# EAGLE board ProtoCAT-Panel-v10 (EAGLE 6.6.0), part 1 of 2
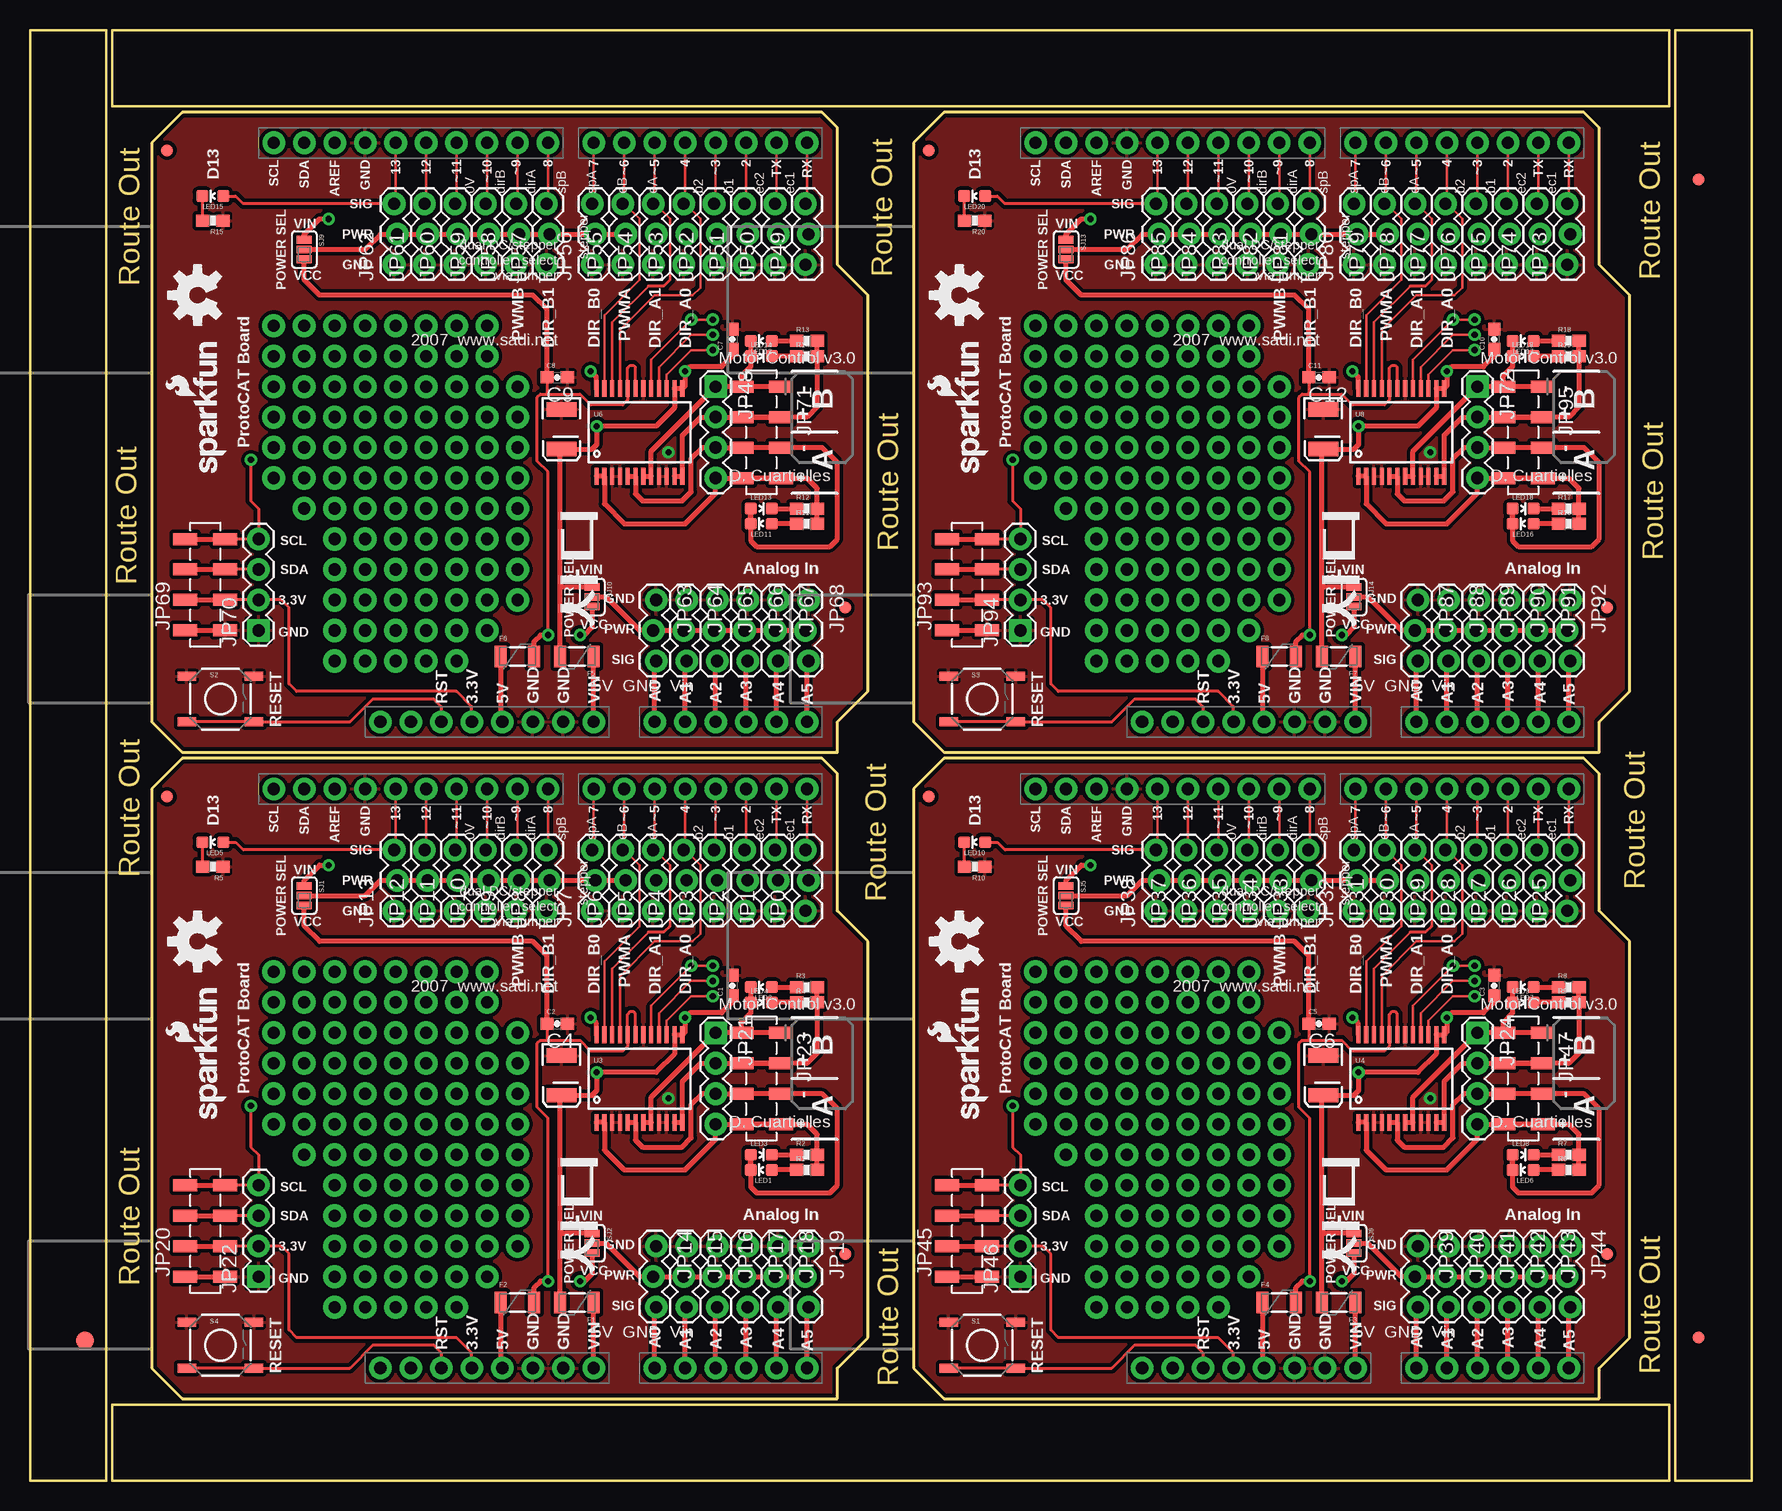
[diagram p0: board, top side]
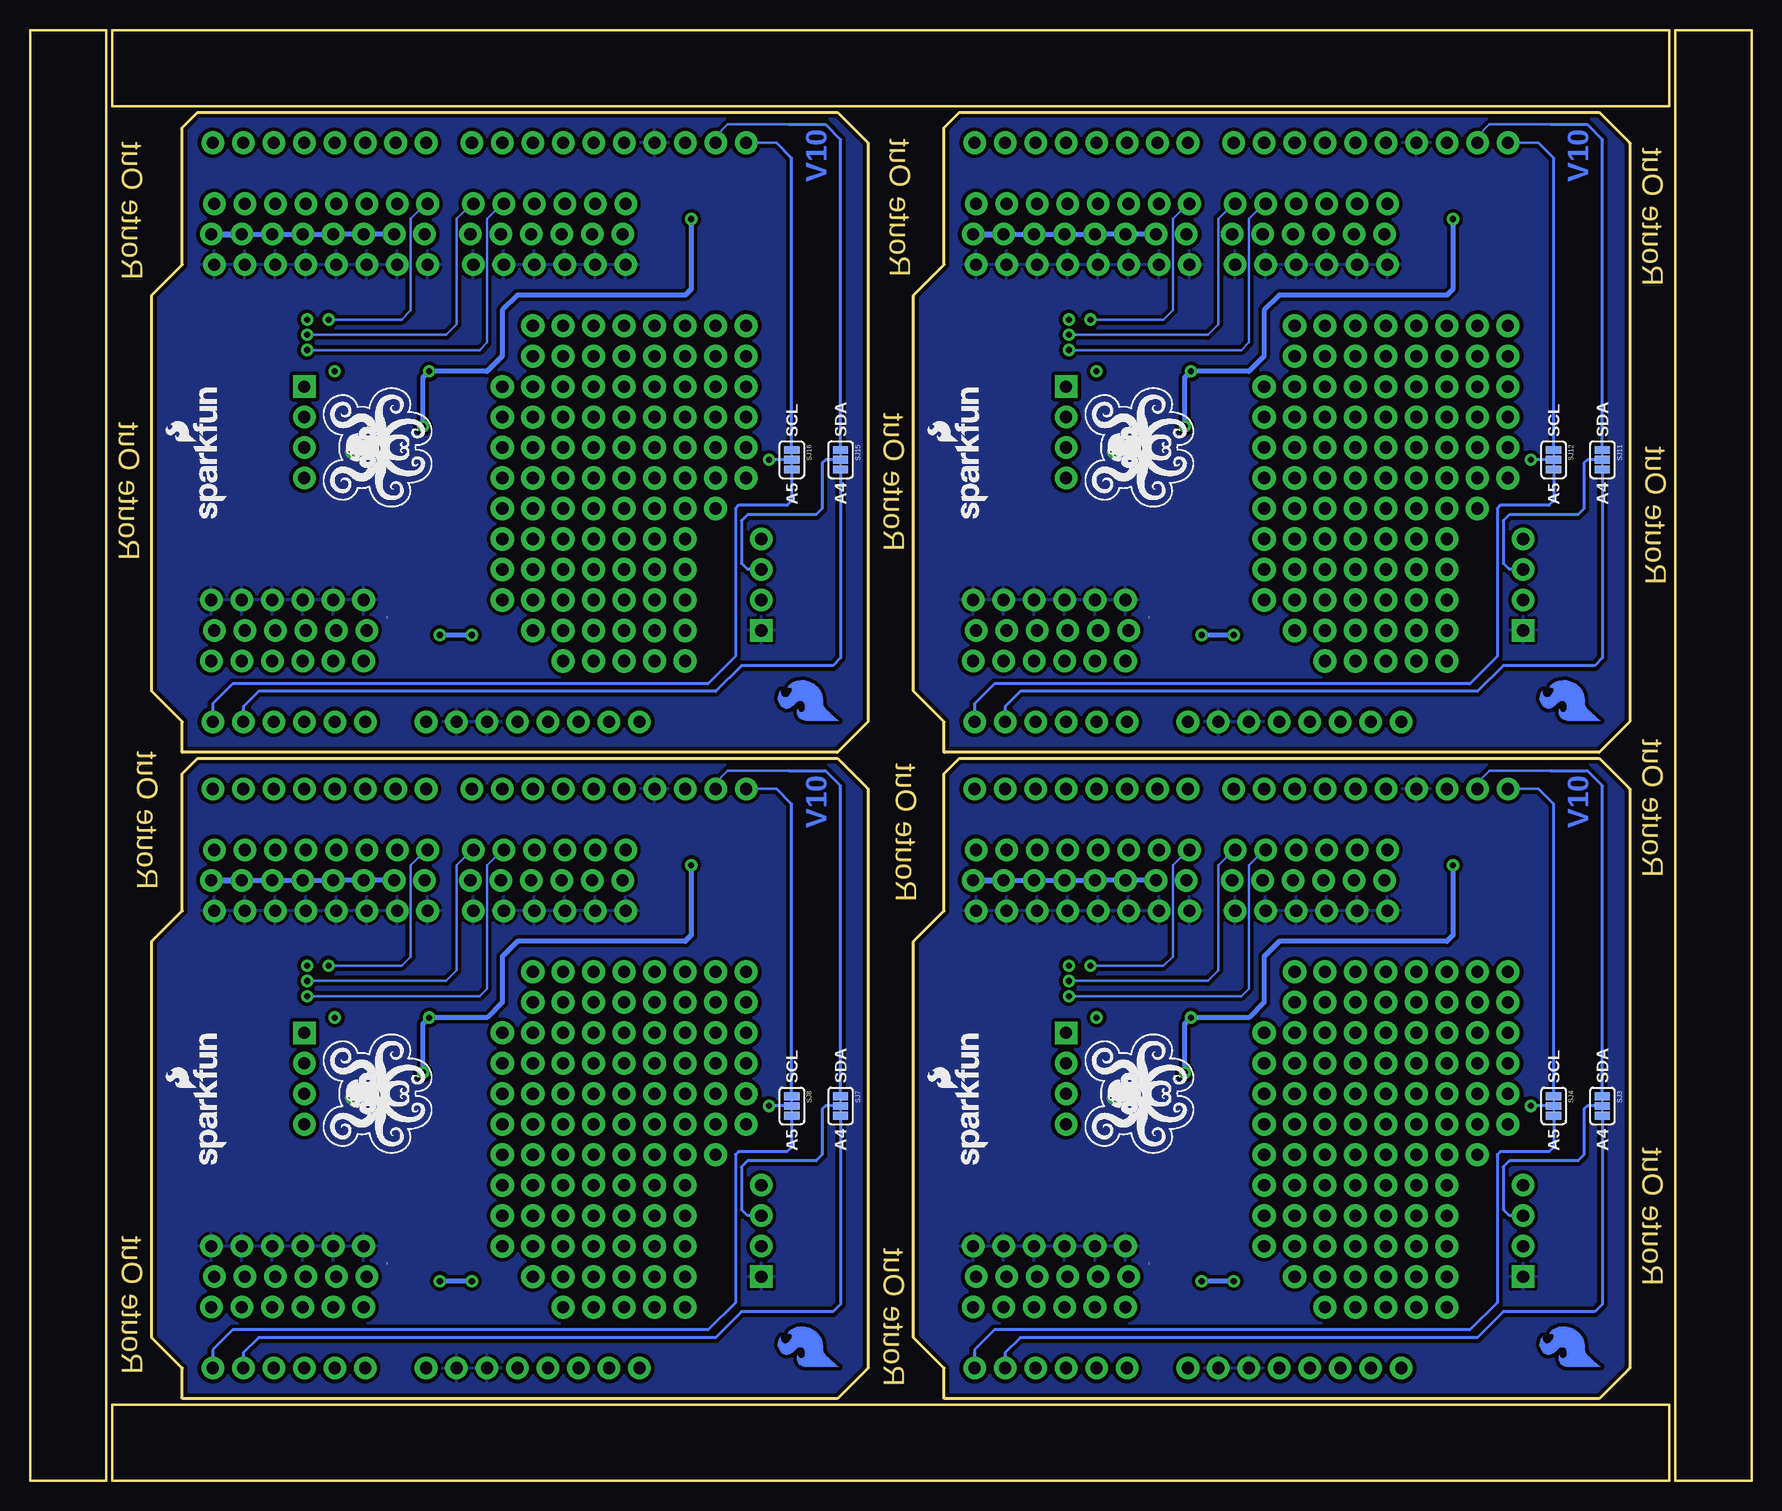
[diagram p1: board, bottom side, seen from below]

Size 143.51 x 120.9 mm. Coordinates in mm from the lower left corner, seen from the top.
Outline: 10.16,57.66 10.16,9.4 12.7,6.86 67.31,6.86 67.31,9.4 69.85,11.94 69.85,44.96 67.31,47.5 67.31,58.93 66.04,60.2 12.7,60.2 10.16,57.66
Outline: 73.66,57.66 73.66,9.4 76.2,6.86 130.81,6.86 130.81,9.4 133.35,11.94 133.35,44.96 130.81,47.5 130.81,58.93 129.54,60.2 76.2,60.2 73.66,57.66
Outline: 10.16,111.51 10.16,63.25 12.7,60.71 67.31,60.71 67.31,63.25 69.85,65.79 69.85,98.81 67.31,101.35 67.31,112.78 66.04,114.05 12.7,114.05 10.16,111.51
Outline: 73.66,111.51 73.66,63.25 76.2,60.71 130.81,60.71 130.81,63.25 133.35,65.79 133.35,98.81 130.81,101.35 130.81,112.78 129.54,114.05 76.2,114.05 73.66,111.51
Outline: 6.35,0 6.35,120.9 0,120.9 0,0 6.35,0
Outline: 143.51,0 143.51,120.9 137.16,120.9 137.16,0 143.51,0
Outline: 6.86,0 136.65,0 136.65,6.35 6.86,6.35 6.86,0
Outline: 6.86,114.55 136.65,114.55 136.65,120.9 6.86,120.9 6.86,114.55
Copper layers (1*16): Top 0.035mm / dielectric 1.5mm / Bottom 0.035mm
Design rules "SparkFun-2-layer": minimum track width 7mil, minimum drill 15mil, track to track 8mil, track to pad 8mil, pad to pad 8mil, via to via 8mil, smd to smd 8mil, copper to edge 8mil, drill to drill 8mil, minimum pad ring 12mil, minimum via ring 10mil, stop-mask expansion 4mil, vias tented up to drill 20mil, thermal gap 10mil
Net classes: 1 power: width 0.61 mm

## Footprints (pad centres in the part's own frame; a part is rotated, then mirrored left to right if it is on the bottom)
0603-CAP = smd 1.1 x 1: 1 -0.85,0; 2 0.85,0
EIA3528 = smd 1.2 x 2.5: A 1.65,0; C -1.65,0
FIDUCIAL-1.5X3 = smd 1.5 x 1.5: 1 0,0
FIDUCIAL-1X2 = smd 1 x 1: 1 0,0
PTC-1206 = smd 1 x 1.8: 1 -1.4,0; 2 1.4,0
1X03_LOCK = drill 1.016 pad 1.88: 1 0,0.127; 2 2.54,-0.127; 3 5.08,0.127
1X04_SMD_STRAIGHT_COMBO = smd 1 x 2: 1 0,-1.65; 1-2 0,1.65; 2 2.54,1.65; 2-2 2.54,-1.65; 3 5.08,-1.65; 3-2 5.08,1.65; 4 7.62,1.65; 4-2 7.62,-1.65
1X04 = drill 1.016 pad 1.88 square: 1 0,0 | drill 1.016 pad 1.88: 2 2.54,0; 3 5.08,0; 4 7.62,0
LED-0603 = smd 1 x 1: A 0,-0.877; C 0,0.877
0603-RES = smd 1.1 x 1: 1 -0.85,0; 2 0.85,0
TACTILE-SWITCH-SMD = smd 1.524 x 0.762: 1 -2.794,1.905; 2 2.794,1.905; 3 -2.794,-1.905; 4 2.794,-1.905
PAD-JUMPER-3-2OF3_NC_BY_PASTE_YES_SILK_FULL_BOX = smd 0.635 x 1.27: 1 -0.813,0; 2 0,0; 3 0.813,0
PAD-JUMPER-3-3OF3_NC_BY_TRACE_YES_SILK_FULL_BOX = smd 0.635 x 1.27: 1 -0.813,0; 2 0,0; 3 0.813,0
UNO_R3_SHIELD_NOLABELS = drill 1.016 pad 1.88: 3.3V 50.8,26.67; 5V 50.8,29.21; A0 50.8,41.91; A1 50.8,44.45; A2 50.8,46.99; A3 50.8,49.53; A4 50.8,52.07; A5 50.8,54.61; AREF 2.54,15.24; D2 2.54,49.53; D3 2.54,46.99; D4 2.54,44.45; D5 2.54,41.91; D6 2.54,39.37; D7 2.54,36.83; D8 2.54,33.02; D9 2.54,30.48; D10 2.54,27.94; D11 2.54,25.4; D12 2.54,22.86; D13 2.54,20.32; GND@0 50.8,31.75; GND@1 50.8,34.29; GND@2 2.54,17.78; IOREF 50.8,21.59; NC 50.8,19.05; RES 50.8,24.13; RX 2.54,54.61; SCL 2.54,10.16; SDA 2.54,12.7; TX 2.54,52.07; VIN 50.8,36.83
SSOP24 = smd 0.348 x 1.397: 1 -3.575,-3.656; 2 -2.925,-3.656; 3 -2.275,-3.656; 4 -1.625,-3.656; 5 -0.975,-3.656; 6 -0.325,-3.656; 7 0.325,-3.656; 8 0.975,-3.656; 9 1.625,-3.656; 10 2.275,-3.656; 11 2.925,-3.656; 12 3.575,-3.656; 13 3.575,3.656; 14 2.925,3.656; 15 2.275,3.656; 16 1.625,3.656; 17 0.975,3.656; 18 0.325,3.656; 19 -0.325,3.656; 20 -0.975,3.656; 21 -1.625,3.656; 22 -2.275,3.656; 23 -2.925,3.656; 24 -3.575,3.656

## Placement (x,y rotation side)
C1  0.1uF  [0603-CAP]  58.55,41.27 90 top
C2  0.1uF  [0603-CAP]  43.94,38.1 0 top
C3  0.1uF  [0603-CAP]  122.05,41.27 90 top
C4  10uf , 20V  [EIA3528]  44.32,33.78 270 top
C5  0.1uF  [0603-CAP]  107.44,38.1 0 top
C6  10uf , 20V  [EIA3528]  107.82,33.78 270 top
C7  0.1uF  [0603-CAP]  58.55,95.12 90 top
C8  0.1uF  [0603-CAP]  43.94,91.95 0 top
C9  10uf , 20V  [EIA3528]  44.32,87.63 270 top
C10  0.1uF  [0603-CAP]  122.05,95.12 90 top
C11  0.1uF  [0603-CAP]  107.44,91.95 0 top
C12  10uf , 20V  [EIA3528]  107.82,87.63 270 top
E$1  [FIDUCIAL-1.5X3]  4.57,11.68 0 top
E$2  [FIDUCIAL-1X2]  139.06,11.94 0 top
E$3  [FIDUCIAL-1X2]  139.06,108.46 180 top
F1  PTCSMD  [PTC-1206]  45.59,14.86 180 top
F2  PTCSMD  [PTC-1206]  40.64,14.86 0 top
F3  PTCSMD  [PTC-1206]  109.09,14.86 180 top
F4  PTCSMD  [PTC-1206]  104.14,14.86 0 top
F5  PTCSMD  [PTC-1206]  45.59,68.71 180 top
F6  PTCSMD  [PTC-1206]  40.64,68.71 0 top
F7  PTCSMD  [PTC-1206]  109.09,68.71 180 top
F8  PTCSMD  [PTC-1206]  104.14,68.71 0 top
FID1  FIDUCIAL1X2  [FIDUCIAL-1X2]  11.43,57.02 0 top
FID2  FIDUCIAL1X2  [FIDUCIAL-1X2]  67.94,18.92 0 top
FID3  FIDUCIAL1X2  [FIDUCIAL-1X2]  74.93,57.02 0 top
FID4  FIDUCIAL1X2  [FIDUCIAL-1X2]  131.44,18.92 0 top
FID5  FIDUCIAL1X2  [FIDUCIAL-1X2]  11.43,110.87 0 top
FID6  FIDUCIAL1X2  [FIDUCIAL-1X2]  67.94,72.77 0 top
FID7  FIDUCIAL1X2  [FIDUCIAL-1X2]  74.93,110.87 0 top
FID8  FIDUCIAL1X2  [FIDUCIAL-1X2]  131.44,72.77 0 top
JP0  D0  [1X03_LOCK]  64.77,47.5 90 top
JP1  D1  [1X03_LOCK]  62.23,47.5 90 top
JP2  D2  [1X03_LOCK]  59.69,47.5 90 top
JP3  D3  [1X03_LOCK]  57.15,47.5 90 top
JP4  D4  [1X03_LOCK]  54.61,47.5 90 top
JP5  D5  [1X03_LOCK]  52.07,47.5 90 top
JP6  D6  [1X03_LOCK]  49.53,47.5 90 top
JP7  D7  [1X03_LOCK]  46.99,47.5 90 top
JP8  D8  [1X03_LOCK]  43.18,47.5 90 top
JP9  D9  [1X03_LOCK]  40.64,47.5 90 top
JP10  D10  [1X03_LOCK]  38.1,47.5 90 top
JP11  D11  [1X03_LOCK]  35.56,47.5 90 top
JP12  D12  [1X03_LOCK]  33.02,47.5 90 top
JP13  D13  [1X03_LOCK]  30.48,47.5 90 top
JP14  A0  [1X03_LOCK]  52.07,19.56 270 top
JP15  A1  [1X03_LOCK]  54.61,19.56 270 top
JP16  A2  [1X03_LOCK]  57.15,19.56 270 top
JP17  A3  [1X03_LOCK]  59.69,19.56 270 top
JP18  A4  [1X03_LOCK]  62.23,19.56 270 top
JP19  A5  [1X03_LOCK]  64.77,19.56 270 top
JP20  [1X04_SMD_STRAIGHT_COMBO]  14.61,17.02 90 top
JP21  [1X04]  57.15,37.34 270 top
JP22  [1X04]  19.05,17.02 90 top
JP23  [1X04_SMD_STRAIGHT_COMBO]  60.96,37.34 270 top
JP24  [1X04]  120.65,37.34 270 top
JP25  D0  [1X03_LOCK]  128.27,47.5 90 top
JP26  D1  [1X03_LOCK]  125.73,47.5 90 top
JP27  D2  [1X03_LOCK]  123.19,47.5 90 top
JP28  D3  [1X03_LOCK]  120.65,47.5 90 top
JP29  D4  [1X03_LOCK]  118.11,47.5 90 top
JP30  D5  [1X03_LOCK]  115.57,47.5 90 top
JP31  D6  [1X03_LOCK]  113.03,47.5 90 top
JP32  D7  [1X03_LOCK]  110.49,47.5 90 top
JP33  D8  [1X03_LOCK]  106.68,47.5 90 top
JP34  D9  [1X03_LOCK]  104.14,47.5 90 top
JP35  D10  [1X03_LOCK]  101.6,47.5 90 top
JP36  D11  [1X03_LOCK]  99.06,47.5 90 top
JP37  D12  [1X03_LOCK]  96.52,47.5 90 top
JP38  D13  [1X03_LOCK]  93.98,47.5 90 top
JP39  A0  [1X03_LOCK]  115.57,19.56 270 top
JP40  A1  [1X03_LOCK]  118.11,19.56 270 top
JP41  A2  [1X03_LOCK]  120.65,19.56 270 top
JP42  A3  [1X03_LOCK]  123.19,19.56 270 top
JP43  A4  [1X03_LOCK]  125.73,19.56 270 top
JP44  A5  [1X03_LOCK]  128.27,19.56 270 top
JP45  [1X04_SMD_STRAIGHT_COMBO]  78.11,17.02 90 top
JP46  [1X04]  82.55,17.02 90 top
JP47  [1X04_SMD_STRAIGHT_COMBO]  124.46,37.34 270 top
JP48  [1X04]  57.15,91.19 270 top
JP49  D0  [1X03_LOCK]  64.77,101.35 90 top
JP50  D1  [1X03_LOCK]  62.23,101.35 90 top
JP51  D2  [1X03_LOCK]  59.69,101.35 90 top
JP52  D3  [1X03_LOCK]  57.15,101.35 90 top
JP53  D4  [1X03_LOCK]  54.61,101.35 90 top
JP54  D5  [1X03_LOCK]  52.07,101.35 90 top
JP55  D6  [1X03_LOCK]  49.53,101.35 90 top
JP56  D7  [1X03_LOCK]  46.99,101.35 90 top
JP57  D8  [1X03_LOCK]  43.18,101.35 90 top
JP58  D9  [1X03_LOCK]  40.64,101.35 90 top
JP59  D10  [1X03_LOCK]  38.1,101.35 90 top
JP60  D11  [1X03_LOCK]  35.56,101.35 90 top
JP61  D12  [1X03_LOCK]  33.02,101.35 90 top
JP62  D13  [1X03_LOCK]  30.48,101.35 90 top
JP63  A0  [1X03_LOCK]  52.07,73.41 270 top
JP64  A1  [1X03_LOCK]  54.61,73.41 270 top
JP65  A2  [1X03_LOCK]  57.15,73.41 270 top
JP66  A3  [1X03_LOCK]  59.69,73.41 270 top
JP67  A4  [1X03_LOCK]  62.23,73.41 270 top
JP68  A5  [1X03_LOCK]  64.77,73.41 270 top
JP69  [1X04_SMD_STRAIGHT_COMBO]  14.61,70.87 90 top
JP70  [1X04]  19.05,70.87 90 top
JP71  [1X04_SMD_STRAIGHT_COMBO]  60.96,91.19 270 top
JP72  [1X04]  120.65,91.19 270 top
JP73  D0  [1X03_LOCK]  128.27,101.35 90 top
JP74  D1  [1X03_LOCK]  125.73,101.35 90 top
JP75  D2  [1X03_LOCK]  123.19,101.35 90 top
JP76  D3  [1X03_LOCK]  120.65,101.35 90 top
JP77  D4  [1X03_LOCK]  118.11,101.35 90 top
JP78  D5  [1X03_LOCK]  115.57,101.35 90 top
JP79  D6  [1X03_LOCK]  113.03,101.35 90 top
JP80  D7  [1X03_LOCK]  110.49,101.35 90 top
JP81  D8  [1X03_LOCK]  106.68,101.35 90 top
JP82  D9  [1X03_LOCK]  104.14,101.35 90 top
JP83  D10  [1X03_LOCK]  101.6,101.35 90 top
JP84  D11  [1X03_LOCK]  99.06,101.35 90 top
JP85  D12  [1X03_LOCK]  96.52,101.35 90 top
JP86  D13  [1X03_LOCK]  93.98,101.35 90 top
JP87  A0  [1X03_LOCK]  115.57,73.41 270 top
JP88  A1  [1X03_LOCK]  118.11,73.41 270 top
JP89  A2  [1X03_LOCK]  120.65,73.41 270 top
JP90  A3  [1X03_LOCK]  123.19,73.41 270 top
JP91  A4  [1X03_LOCK]  125.73,73.41 270 top
JP92  A5  [1X03_LOCK]  128.27,73.41 270 top
JP93  [1X04_SMD_STRAIGHT_COMBO]  78.11,70.87 90 top
JP94  [1X04]  82.55,70.87 90 top
JP95  [1X04_SMD_STRAIGHT_COMBO]  124.46,91.19 270 top
LED1  Yellow  [LED-0603]  60.96,25.91 90 top
LED2  Yellow  [LED-0603]  60.96,41.15 90 top
LED3  Blue  [LED-0603]  60.96,27.18 270 top
LED4  Blue  [LED-0603]  60.96,39.88 270 top
LED5  Blue  [LED-0603]  15.24,53.21 90 top
LED6  Yellow  [LED-0603]  124.46,25.91 90 top
LED7  Yellow  [LED-0603]  124.46,41.15 90 top
LED8  Blue  [LED-0603]  124.46,27.18 270 top
LED9  Blue  [LED-0603]  124.46,39.88 270 top
LED10  Blue  [LED-0603]  78.74,53.21 90 top
LED11  Yellow  [LED-0603]  60.96,79.76 90 top
LED12  Yellow  [LED-0603]  60.96,95 90 top
LED13  Blue  [LED-0603]  60.96,81.03 270 top
LED14  Blue  [LED-0603]  60.96,93.73 270 top
LED15  Blue  [LED-0603]  15.24,107.06 90 top
LED16  Yellow  [LED-0603]  124.46,79.76 90 top
LED17  Yellow  [LED-0603]  124.46,95 90 top
LED18  Blue  [LED-0603]  124.46,81.03 270 top
LED19  Blue  [LED-0603]  124.46,93.73 270 top
LED20  Blue  [LED-0603]  78.74,107.06 90 top
LOGO1  OSHW-LOGOM  [OSHW-LOGO-M]  13.97,44.96 90 top
LOGO2  SFE_LOGO_NAME_FLAME.1_INCH  [SFE_LOGO_NAME_FLAME_.1]  16.51,29.72 90 top
LOGO3  SFE_LOGO_FLAME.2COP  [SFE_LOGO_FLAME_COPPER_.2]  12.32,9.14 90 bottom
LOGO4  SFE_LOGO_NAME_FLAME.1_INCH  [SFE_LOGO_NAME_FLAME_.1]  63.5,25.91 90 bottom
LOGO5  OSHW-LOGOM  [OSHW-LOGO-M]  77.47,44.96 90 top
LOGO6  SFE_LOGO_NAME_FLAME.1_INCH  [SFE_LOGO_NAME_FLAME_.1]  80.01,29.72 90 top
LOGO7  SFE_LOGO_FLAME.2COP  [SFE_LOGO_FLAME_COPPER_.2]  75.82,9.14 90 bottom
LOGO8  SFE_LOGO_NAME_FLAME.1_INCH  [SFE_LOGO_NAME_FLAME_.1]  127,25.91 90 bottom
LOGO9  OSHW-LOGOM  [OSHW-LOGO-M]  13.97,98.81 90 top
LOGO10  SFE_LOGO_NAME_FLAME.1_INCH  [SFE_LOGO_NAME_FLAME_.1]  16.51,83.57 90 top
LOGO11  SFE_LOGO_FLAME.2COP  [SFE_LOGO_FLAME_COPPER_.2]  12.32,62.99 90 bottom
LOGO12  SFE_LOGO_NAME_FLAME.1_INCH  [SFE_LOGO_NAME_FLAME_.1]  63.5,79.76 90 bottom
LOGO13  OSHW-LOGOM  [OSHW-LOGO-M]  77.47,98.81 90 top
LOGO14  SFE_LOGO_NAME_FLAME.1_INCH  [SFE_LOGO_NAME_FLAME_.1]  80.01,83.57 90 top
LOGO15  SFE_LOGO_FLAME.2COP  [SFE_LOGO_FLAME_COPPER_.2]  75.82,62.99 90 bottom
LOGO16  SFE_LOGO_NAME_FLAME.1_INCH  [SFE_LOGO_NAME_FLAME_.1]  127,79.76 90 bottom
R1  1k  [0603-RES]  64.77,25.91 0 top
R2  1k  [0603-RES]  64.77,27.18 0 top
R3  1k  [0603-RES]  64.77,41.15 0 top
R4  1k  [0603-RES]  64.77,39.88 0 top
R5  330  [0603-RES]  15.24,51.18 180 top
R6  1k  [0603-RES]  128.27,25.91 0 top
R7  1k  [0603-RES]  128.27,27.18 0 top
R8  1k  [0603-RES]  128.27,41.15 0 top
R9  1k  [0603-RES]  128.27,39.88 0 top
R10  330  [0603-RES]  78.74,51.18 180 top
R11  1k  [0603-RES]  64.77,79.76 0 top
R12  1k  [0603-RES]  64.77,81.03 0 top
R13  1k  [0603-RES]  64.77,95 0 top
R14  1k  [0603-RES]  64.77,93.73 0 top
R15  330  [0603-RES]  15.24,105.03 180 top
R16  1k  [0603-RES]  128.27,79.76 0 top
R17  1k  [0603-RES]  128.27,81.03 0 top
R18  1k  [0603-RES]  128.27,95 0 top
R19  1k  [0603-RES]  128.27,93.73 0 top
R20  330  [0603-RES]  78.74,105.03 180 top
S1  RESET  [TACTILE-SWITCH-SMD]  79.38,11.3 0 top
S2  RESET  [TACTILE-SWITCH-SMD]  15.88,65.15 0 top
S3  RESET  [TACTILE-SWITCH-SMD]  79.38,65.15 0 top
S4  RESET  [TACTILE-SWITCH-SMD]  15.88,11.3 0 top
SJ1  JUMPER-PAD-3-2OF3_NC_BY_PASTE  [PAD-JUMPER-3-2OF3_NC_BY_PASTE_YES_SILK_FULL_BOX]  22.86,48.77 270 top
SJ2  JUMPER-PAD-3-2OF3_NC_BY_PASTE  [PAD-JUMPER-3-2OF3_NC_BY_PASTE_YES_SILK_FULL_BOX]  46.86,19.81 270 top
SJ3  [PAD-JUMPER-3-3OF3_NC_BY_TRACE_YES_SILK_FULL_BOX]  12.45,31.24 270 bottom
SJ4  [PAD-JUMPER-3-3OF3_NC_BY_TRACE_YES_SILK_FULL_BOX]  16.51,31.24 270 bottom
SJ5  JUMPER-PAD-3-2OF3_NC_BY_PASTE  [PAD-JUMPER-3-2OF3_NC_BY_PASTE_YES_SILK_FULL_BOX]  86.36,48.77 270 top
SJ6  JUMPER-PAD-3-2OF3_NC_BY_PASTE  [PAD-JUMPER-3-2OF3_NC_BY_PASTE_YES_SILK_FULL_BOX]  110.36,19.81 270 top
SJ7  [PAD-JUMPER-3-3OF3_NC_BY_TRACE_YES_SILK_FULL_BOX]  75.95,31.24 270 bottom
SJ8  [PAD-JUMPER-3-3OF3_NC_BY_TRACE_YES_SILK_FULL_BOX]  80.01,31.24 270 bottom
SJ9  JUMPER-PAD-3-2OF3_NC_BY_PASTE  [PAD-JUMPER-3-2OF3_NC_BY_PASTE_YES_SILK_FULL_BOX]  22.86,102.62 270 top
SJ10  JUMPER-PAD-3-2OF3_NC_BY_PASTE  [PAD-JUMPER-3-2OF3_NC_BY_PASTE_YES_SILK_FULL_BOX]  46.86,73.66 270 top
SJ11  [PAD-JUMPER-3-3OF3_NC_BY_TRACE_YES_SILK_FULL_BOX]  12.45,85.09 270 bottom
SJ12  [PAD-JUMPER-3-3OF3_NC_BY_TRACE_YES_SILK_FULL_BOX]  16.51,85.09 270 bottom
SJ13  JUMPER-PAD-3-2OF3_NC_BY_PASTE  [PAD-JUMPER-3-2OF3_NC_BY_PASTE_YES_SILK_FULL_BOX]  86.36,102.62 270 top
SJ14  JUMPER-PAD-3-2OF3_NC_BY_PASTE  [PAD-JUMPER-3-2OF3_NC_BY_PASTE_YES_SILK_FULL_BOX]  110.36,73.66 270 top
SJ15  [PAD-JUMPER-3-3OF3_NC_BY_TRACE_YES_SILK_FULL_BOX]  75.95,85.09 270 bottom
SJ16  [PAD-JUMPER-3-3OF3_NC_BY_TRACE_YES_SILK_FULL_BOX]  80.01,85.09 270 bottom
U1  ARDUINO  [UNO_R3_SHIELD_NOLABELS]  10.16,60.2 270 top
U2  ARDUINO  [UNO_R3_SHIELD_NOLABELS]  73.66,60.2 270 top
U3  TB6612FNG  [SSOP24]  50.8,33.53 0 top
U4  TB6612FNG  [SSOP24]  114.3,33.53 0 top
U5  ARDUINO  [UNO_R3_SHIELD_NOLABELS]  10.16,114.05 270 top
U6  TB6612FNG  [SSOP24]  50.8,87.38 0 top
U7  ARDUINO  [UNO_R3_SHIELD_NOLABELS]  73.66,114.05 270 top
U8  TB6612FNG  [SSOP24]  114.3,87.38 0 top
U$1  SFE_LUDUS  [SFE_LUDUS-M]  50.8,32.26 270 top
U$2  SFE_LUDUS  [SFE_LUDUS-M]  114.3,32.26 270 top
U$3  SFE_LUDUS  [SFE_LUDUS-M]  50.8,86.11 270 top
U$4  SFE_LUDUS  [SFE_LUDUS-M]  114.3,86.11 270 top

## Library data of the parts
C1-C3 C5 C7 C8 C10 C11 = SparkFun-Capacitors; PROD_ID: CAP-08604
C4 C6 C9 C12 = SparkFun-Capacitors; PROD_ID: CAP-08063
E$1 = SparkFun-Retired
E$2 E$3 FID1-FID8 LOGO1-LOGO16 U$1-U$4 = SparkFun-Aesthetics
F1-F8 = SparkFun-PowerIC; PROD_ID: RES-11150
JP0 JP1-JP19 JP21 JP22 JP24-JP44 JP46 JP48-JP68 JP70 JP72-JP92 JP94 = SparkFun-Connectors
JP20 JP23 JP45 JP47 JP69 JP71 JP93 JP95 = SparkFun-Connectors; PROD_ID: CONN-08511
LED1-LED20 = SparkFun-LED
R1-R4 R6-R9 R11-R14 R16-R19 = SparkFun-Resistors; PROD_ID: RES-07856; VALUE: 1K
R5 R10 R15 R20 = SparkFun-Resistors; PROD_ID: RES-00818
S1-S4 = SparkFun-Electromechanical; PROD_ID: SWCH-08247
SJ1-SJ16 = SparkFun-Passives
U1 U2 U5 U7 = SparkFun-Boards
U3 U4 U6 U8 = SparkFun-PowerIC; PROD_ID: IC-09363

## Nets
3.3V: JP20.2 JP22.2 U1.3.3V
3.3V1: JP45.2 JP46.2 U2.3.3V
3.3V2: JP69.2 JP70.2 U5.3.3V
3.3V3: JP93.2 JP94.2 U7.3.3V
A0: JP14.3 U1.A0
A1: JP15.3 U1.A1
A2: JP16.3 U1.A2
A3: JP17.3 U1.A3
A4: JP18.3 SJ3.3 U1.A4
A5: JP19.3 SJ4.3 U1.A5
A6: JP44.3 SJ8.3 U2.A5
A7: JP43.3 SJ7.3 U2.A4
A8: JP41.3 U2.A2
A9: JP40.3 U2.A1
A10: JP39.3 U2.A0
A11: JP42.3 U2.A3
A12: JP68.3 SJ12.3 U5.A5
A13: JP67.3 SJ11.3 U5.A4
A14: JP65.3 U5.A2
A15: JP64.3 U5.A1
A16: JP63.3 U5.A0
A17: JP66.3 U5.A3
A18: JP92.3 SJ16.3 U7.A5
A19: JP91.3 SJ15.3 U7.A4
A20: JP89.3 U7.A2
A21: JP88.3 U7.A1
A22: JP87.3 U7.A0
A23: JP90.3 U7.A3
AIN1: JP4.3 U1.D4 U3.21
AIN2: JP5.3 U1.D5 U3.22
AIN3: JP30.3 U2.D5 U4.22
AIN4: JP29.3 U2.D4 U4.21
AIN5: JP54.3 U5.D5 U6.22
AIN6: JP53.3 U5.D4 U6.21
AIN7: JP78.3 U7.D5 U8.22
AIN8: JP77.3 U7.D4 U8.21
ANALOG_PWR_RAIL: JP14.2 JP15.2 JP16.2 JP17.2 JP18.2 JP19.2 SJ2.2
ANALOG_PWR_RAIL1: JP39.2 JP40.2 JP41.2 JP42.2 JP43.2 JP44.2 SJ6.2
ANALOG_PWR_RAIL2: JP63.2 JP64.2 JP65.2 JP66.2 JP67.2 JP68.2 SJ10.2
ANALOG_PWR_RAIL3: JP87.2 JP88.2 JP89.2 JP90.2 JP91.2 JP92.2 SJ14.2
AOUT1: JP21.4 JP23.4 R1.2 R2.2 U3.1 U3.2
AOUT2: JP21.3 JP23.3 LED1.C LED3.A U3.5 U3.6
AOUT3: JP24.4 JP47.4 R6.2 R7.2 U4.1 U4.2
AOUT4: JP24.3 JP47.3 LED6.C LED8.A U4.5 U4.6
AOUT5: JP48.4 JP71.4 R11.2 R12.2 U6.1 U6.2
AOUT6: JP48.3 JP71.3 LED11.C LED13.A U6.5 U6.6
AOUT7: JP72.4 JP95.4 R16.2 R17.2 U8.1 U8.2
AOUT8: JP72.3 JP95.3 LED16.C LED18.A U8.5 U8.6
BIN1: JP7.3 U1.D7 U3.17
BIN2: JP32.3 U2.D7 U4.17
BIN3: JP56.3 U5.D7 U6.17
BIN4: JP80.3 U7.D7 U8.17
BOUT1: JP21.2 JP23.2 R3.2 R4.2 U3.11 U3.12
BOUT2: JP21.1 JP23.1 LED2.C LED4.A U3.7 U3.8
BOUT3: JP24.1 JP47.1 LED7.C LED9.A U4.7 U4.8
BOUT4: JP24.2 JP47.2 R8.2 R9.2 U4.11 U4.12
BOUT5: JP48.1 JP71.1 LED12.C LED14.A U6.7 U6.8
BOUT6: JP48.2 JP71.2 R13.2 R14.2 U6.11 U6.12
BOUT7: JP72.1 JP95.1 LED17.C LED19.A U8.7 U8.8
BOUT8: JP72.2 JP95.2 R18.2 R19.2 U8.11 U8.12
D0: JP0.3 U1.RX
D1: JP1.3 U1.TX
D2: JP2.3 U1.D2
D3: JP3.3 U1.D3
D4: JP37.3 U2.D12
D5: JP38.3 LED10.A U2.D13
D6: JP35.3 U2.D10
D7: JP27.3 U2.D2
D8: JP36.3 U2.D11
D9: JP25.3 U2.RX
D10: JP10.3 U1.D10
D11: JP11.3 U1.D11
D12: JP12.3 U1.D12
D13: JP13.3 LED5.A U1.D13
D14: JP26.3 U2.TX
D15: JP28.3 U2.D3
D16: JP61.3 U5.D12
D17: JP62.3 LED15.A U5.D13
D18: JP59.3 U5.D10
D19: JP51.3 U5.D2
D20: JP60.3 U5.D11
D21: JP49.3 U5.RX
D22: JP50.3 U5.TX
D23: JP52.3 U5.D3
D24: JP85.3 U7.D12
D25: JP86.3 LED20.A U7.D13
D26: JP83.3 U7.D10
D27: JP75.3 U7.D2
D28: JP84.3 U7.D11
D29: JP73.3 U7.RX
D30: JP74.3 U7.TX
D31: JP76.3 U7.D3
FUSED_VCC: C2.1 F2.2 SJ1.3 SJ2.3 U3.19 U3.20
FUSED_VCC1: C5.1 F4.2 SJ5.3 SJ6.3 U4.19 U4.20
FUSED_VCC2: C8.1 F6.2 SJ9.3 SJ10.3 U6.19 U6.20
FUSED_VCC3: C11.1 F8.2 SJ13.3 SJ14.3 U8.19 U8.20
FUSED_VIN: C1.1 C4.A F1.2 SJ1.1 SJ2.1 U3.13 U3.14 U3.24
FUSED_VIN1: C3.1 C6.A F3.2 SJ5.1 SJ6.1 U4.13 U4.14 U4.24
FUSED_VIN2: C7.1 C9.A F5.2 SJ9.1 SJ10.1 U6.13 U6.14 U6.24
FUSED_VIN3: C10.1 C12.A F7.2 SJ13.1 SJ14.1 U8.13 U8.14 U8.24
GND: C1.2 C2.2 C4.C JP0.1 JP1.1 JP2.1 JP3.1 JP4.1 JP5.1 JP6.1 JP7.1 JP8.1 JP9.1 JP10.1 JP11.1 JP12.1 JP13.1 JP14.1 JP15.1 JP16.1 JP17.1 JP18.1 JP19.1 JP20.1 JP22.1 R5.1 S4.1 S4.2 U1.GND@0 U1.GND@1 U1.GND@2 U3.3 U3.4 U3.9 U3.10 U3.18
GND1: C3.2 C5.2 C6.C JP25.1 JP26.1 JP27.1 JP28.1 JP29.1 JP30.1 JP31.1 JP32.1 JP33.1 JP34.1 JP35.1 JP36.1 JP37.1 JP38.1 JP39.1 JP40.1 JP41.1 JP42.1 JP43.1 JP44.1 JP45.1 JP46.1 R10.1 S1.1 S1.2 U2.GND@0 U2.GND@1 U2.GND@2 U4.3 U4.4 U4.9 U4.10 U4.18
GND2: C7.2 C8.2 C9.C JP49.1 JP50.1 JP51.1 JP52.1 JP53.1 JP54.1 JP55.1 JP56.1 JP57.1 JP58.1 JP59.1 JP60.1 JP61.1 JP62.1 JP63.1 JP64.1 JP65.1 JP66.1 JP67.1 JP68.1 JP69.1 JP70.1 R15.1 S2.1 S2.2 U5.GND@0 U5.GND@1 U5.GND@2 U6.3 U6.4 U6.9 U6.10 U6.18
GND3: C10.2 C11.2 C12.C JP73.1 JP74.1 JP75.1 JP76.1 JP77.1 JP78.1 JP79.1 JP80.1 JP81.1 JP82.1 JP83.1 JP84.1 JP85.1 JP86.1 JP87.1 JP88.1 JP89.1 JP90.1 JP91.1 JP92.1 JP93.1 JP94.1 R20.1 S3.1 S3.2 U7.GND@0 U7.GND@1 U7.GND@2 U8.3 U8.4 U8.9 U8.10 U8.18
N$1: LED5.C R5.2
N$4: LED1.A R1.1
N$5: LED3.C R2.1
N$8: LED2.A R3.1
N$9: LED4.C R4.1
N$20: JP8.3 U1.D8 U3.16
N$21: LED6.A R6.1
N$22: LED8.C R7.1
N$43: LED7.A R8.1
N$44: LED9.C R9.1
N$75: LED10.C R10.2
N$196: JP33.3 U2.D8 U4.16
N$197: LED11.A R11.1
N$198: LED13.C R12.1
N$199: LED12.A R13.1
N$200: LED14.C R14.1
N$201: LED15.C R15.2
N$294: JP57.3 U5.D8 U6.16
N$295: LED16.A R16.1
N$296: LED18.C R17.1
N$297: LED17.A R18.1
N$298: LED19.C R19.1
N$299: LED20.C R20.2
N$392: JP81.3 U7.D8 U8.16
PWMA: JP6.3 U1.D6 U3.23
PWMA1: JP31.3 U2.D6 U4.23
PWMA2: JP55.3 U5.D6 U6.23
PWMA3: JP79.3 U7.D6 U8.23
PWMB: JP9.3 U1.D9 U3.15
PWMB1: JP34.3 U2.D9 U4.15
PWMB2: JP58.3 U5.D9 U6.15
PWMB3: JP82.3 U7.D9 U8.15
PWR_RAIL: JP0.2 JP1.2 JP2.2 JP3.2 JP4.2 JP5.2 JP6.2 JP7.2 JP8.2 JP9.2 JP10.2 JP11.2 JP12.2 JP13.2 SJ1.2
PWR_RAIL1: JP25.2 JP26.2 JP27.2 JP28.2 JP29.2 JP30.2 JP31.2 JP32.2 JP33.2 JP34.2 JP35.2 JP36.2 JP37.2 JP38.2 SJ5.2
PWR_RAIL2: JP49.2 JP50.2 JP51.2 JP52.2 JP53.2 JP54.2 JP55.2 JP56.2 JP57.2 JP58.2 JP59.2 JP60.2 JP61.2 JP62.2 SJ9.2
PWR_RAIL3: JP73.2 JP74.2 JP75.2 JP76.2 JP77.2 JP78.2 JP79.2 JP80.2 JP81.2 JP82.2 JP83.2 JP84.2 JP85.2 JP86.2 SJ13.2
RESET: S4.3 S4.4 U1.RES
RESET1: S1.3 S1.4 U2.RES
RESET2: S2.3 S2.4 U5.RES
RESET3: S3.3 S3.4 U7.RES
SCL: SJ4.1 U1.SCL
SCL1: SJ8.1 U2.SCL
SCL2: SJ12.1 U5.SCL
SCL3: SJ16.1 U7.SCL
SCL_I2C_PORT: JP20.4 JP22.4 SJ4.2
SCL_I2C_PORT1: JP45.4 JP46.4 SJ8.2
SCL_I2C_PORT2: JP69.4 JP70.4 SJ12.2
SCL_I2C_PORT3: JP93.4 JP94.4 SJ16.2
SDA: SJ3.1 U1.SDA
SDA1: SJ7.1 U2.SDA
SDA2: SJ11.1 U5.SDA
SDA3: SJ15.1 U7.SDA
SDA_I2C_PORT: JP20.3 JP22.3 SJ3.2
SDA_I2C_PORT1: JP45.3 JP46.3 SJ7.2
SDA_I2C_PORT2: JP69.3 JP70.3 SJ11.2
SDA_I2C_PORT3: JP93.3 JP94.3 SJ15.2
VCC: F2.1 U1.5V
VCC1: F4.1 U2.5V
VCC2: F6.1 U5.5V
VCC3: F8.1 U7.5V
VIN: F1.1 U1.VIN
VIN1: F3.1 U2.VIN
VIN2: F5.1 U5.VIN
VIN3: F7.1 U7.VIN